# Altium PCB 多通道.PcbDoc (part 3 of 4)
Units mm, origin at the board's own origin, x right, y up, seen from the top; angles counter-clockwise.
Board outline 145 x 32 mm, 2 copper layers (Top Layer, Bottom Layer); 175 components, 157 nets, 554 pads, 195 vias.
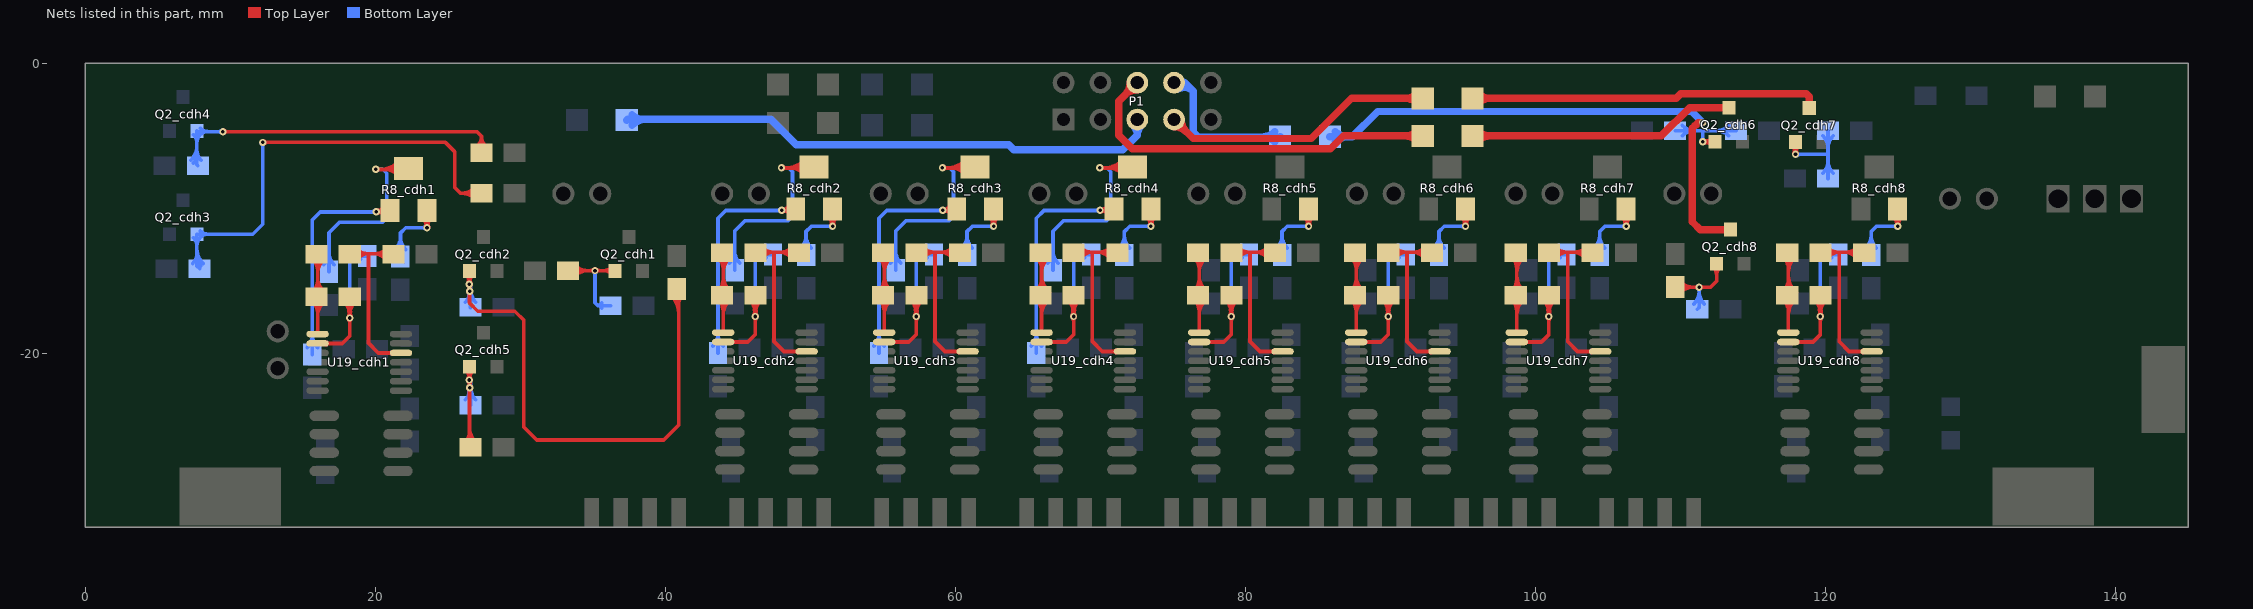
[diagram p3: the nets of this part, all layers, seen from the top]

## Via types
v1: diameter 0.5, hole 0.25, Top Layer to Bottom Layer, 192 vias
v2: diameter 3.1, hole 3.1, Top Layer to Bottom Layer, 3 vias

## Nets (pads, with @x,y where several pads share a name; then routed paths per layer and width w, separated by ;. In a path a pad name is that pad's centre, name@x,y a point inside that pad or via, vN(x,y) a via of type N, cw(c..) or ccw(c..) an arc to the next point about the centre after c; other vN are vias at no path point) (continued)
NetF2_cdh5_2: F2_cdh5.2 P1.5 | length 41.2
  Bottom Layer w0.508: F2_cdh5.2@37.337,-3.922 37.398,-3.861 47.263,-3.861 49.016,-5.613 63.671,-5.613 64.027,-5.969 71.545,-5.969 72.536,-4.978 ; F2_cdh5.2@37.696,-4.281 cw(c38.711,-5.295) 38.711,-3.861 ; F2_cdh5.2@37.696,-3.563 ccw(c38.416,-2.843) 38.416,-3.861 ; P1.5@72.21,-4.26 cw(c71.582,-4.978) 72.536,-4.978 ; P1.5@72.536,-3.886 72.536,-4.978 ; P1.5@72.862,-4.26 ccw(c73.49,-4.978) 72.536,-4.978
NetF2_cdh6_1: F2_cdh6.1 Q2_cdh6.1 | length 21.2
  Top Layer w0.508: F2_cdh6.1@95.644,-5.014 108.67,-5.014 110.617,-3.067 Q2_cdh6.1@113.328,-3.067 ; F2_cdh6.1@96.004,-5.373 cw(c96.871,-6.24) 96.871,-5.014 cw(c96.871,-3.788) F2_cdh6.1@96.004,-4.655 ; Q2_cdh6.1@113.19,-3.205 ccw(c112.855,-3.54) 112.855,-3.067 ccw(c112.855,-2.594) Q2_cdh6.1@113.19,-2.928
NetF2_cdh6_2: F2_cdh6.2 P1.6 | length 29.7
  Top Layer w0.508: P1.6@72.04,-1.346 cw(c70.843,-1.346) 71.689,-2.193 cw(c72.536,-3.04) P1.6@72.536,-1.842 ; P1.6@72.536,-1.346 71.266,-2.616 71.266,-4.978 72.193,-5.906 85.858,-5.906 86.75,-5.014 F2_cdh6.2@92.215,-5.014 ; F2_cdh6.2@91.856,-5.373 ccw(c90.989,-6.24) 90.989,-5.014 ccw(c90.989,-3.788) F2_cdh6.2@91.856,-4.655
NetF2_cdh7_1: F2_cdh7.1 Q2_cdh7.1 | length 26.9
  Top Layer w0.508: F2_cdh7.1@95.644,-2.423 109.686,-2.423 110.001,-2.108 118.669,-2.108 118.866,-2.305 Q2_cdh7.1@118.866,-3.092 ; F2_cdh7.1@96.004,-2.782 cw(c96.871,-3.65) 96.871,-2.423 cw(c96.871,-1.197) F2_cdh7.1@96.004,-2.064 ; Q2_cdh7.1@118.727,-2.929 ccw(c118.392,-2.594) 118.866,-2.594 ccw(c119.339,-2.594) Q2_cdh7.1@119.004,-2.929
NetF2_cdh7_2: F2_cdh7.2 P1.7 | length 22.6
  Top Layer w0.508: P1.7@75.076,-4.382 cw(c75.076,-5.58) 75.923,-4.733 cw(c76.769,-3.886) P1.7@75.572,-3.886 ; P1.7@75.076,-3.886 76.384,-5.194 84.537,-5.194 87.309,-2.423 F2_cdh7.2@92.215,-2.423 ; F2_cdh7.2@91.856,-2.782 ccw(c90.989,-3.65) 90.989,-2.423 ccw(c90.989,-1.197) F2_cdh7.2@91.856,-2.064
NetF2_cdh8_1: F2_cdh8.1 Q2_cdh8.1 | length 40.2
  Top Layer w0.508: 110.968,-4.316 cw(c111.525,-4.873) v1@111.525,-4.085 ; v1(111.525,-4.089) 111.195,-4.089 110.811,-4.473 110.811,-10.945 111.341,-11.474 Q2_cdh8.1@113.43,-11.474 ; Q2_cdh8.1@113.291,-11.613 ccw(c112.957,-11.947) 112.957,-11.474 ccw(c112.957,-11.001) Q2_cdh8.1@113.291,-11.336
  Bottom Layer w0.508: F2_cdh8.1@85.815,-5.07 87.366,-5.07 89.109,-3.327 110.763,-3.327 v1(111.525,-4.089) ; F2_cdh8.1@86.174,-5.429 cw(c87.041,-6.296) 87.041,-5.07 cw(c87.041,-3.843) F2_cdh8.1@86.174,-4.711
NetF2_cdh8_2: F2_cdh8.2 P1.8 | length 14.5
  Bottom Layer w0.508: P1.8@75.07,-1.336 cw(c75.417,-1.959) 75.921,-1.455 ; P1.8@75.076,-1.346 75.813,-1.346 76.397,-1.93 ; P1.8@75.317,-1.78 cw(c75.757,-2.57) 76.397,-1.93 ; 81.102,-5.093 ccw(c81.102,-3.786) F2_cdh8.2@82.026,-4.711 ; 81.216,-5.093 cw(c81.216,-6.239) F2_cdh8.2@82.026,-5.429 ; F2_cdh8.2@82.386,-5.07 82.362,-5.093 76.74,-5.093 76.397,-4.75 76.397,-1.93
NetQ2_cdh1_2: Q2_cdh1.2 R16_cdh1.2 R20_cdh1.1 | length 11.8
  Top Layer w0.254: R16_cdh1.2@33.293,-14.3 v1(35.147,-14.3) 36.502,-14.3 Q2_cdh1.2@36.534,-14.332 ; R16_cdh1.2@33.779,-14.659 cw(c34.646,-15.527) 34.646,-14.3 cw(c34.646,-13.074) R16_cdh1.2@33.779,-13.941 ; v1@35.06,-14.387 ccw(c34.85,-14.597) 34.85,-14.3 ccw(c34.85,-14.003) v1@35.06,-14.213 ; v1@35.234,-14.387 cw(c35.444,-14.597) 35.444,-14.3 cw(c35.444,-14.003) v1@35.234,-14.213 ; 35.737,-14.3 cw(c35.737,-15.104) Q2_cdh1.2@36.306,-14.536 ; 35.771,-14.3 ccw(c35.771,-13.544) Q2_cdh1.2@36.306,-14.079
  Bottom Layer w0.254: v1@35.06,-14.387 cw(c34.85,-14.597) 35.147,-14.597 cw(c35.444,-14.597) v1@35.234,-14.387 ; v1(35.147,-14.3) 35.147,-16.51 35.35,-16.713 ; R20_cdh1.1@35.612,-16.894 ccw(c35.35,-16.993) 35.35,-16.713 ; R20_cdh1.1@35.612,-16.533 cw(c35.35,-16.433) 35.35,-16.713 ; R20_cdh1.1@36.214,-16.713 35.35,-16.713
NetQ2_cdh2_2: Q2_cdh2.2 R16_cdh2.2 R20_cdh2.1 | length 46.9
  Top Layer w0.254: Q2_cdh2.2@26.273,-14.586 cw(c25.721,-15.137) 26.501,-15.137 cw(c27.281,-15.137) Q2_cdh2.2@26.729,-14.586 ; v1@26.379,-15.179 ccw(c26,-14.959) 26.423,-14.846 ; v1@26.399,-15.327 cw(c26.152,-15.574) v1@26.501,-15.574 ; v1@26.399,-15.153 ccw(c26.152,-14.906) 26.501,-14.906 ; v1@26.424,-15.81 cw(c26.239,-15.995) 26.501,-15.995 ; v1@26.424,-15.636 ccw(c26.239,-15.45) v1@26.501,-15.45 ; v1@26.424,-15.133 ccw(c26.296,-14.912) 26.544,-14.978 ; 26.501,-16.044 cw(c26.833,-16.044) v1@26.598,-15.81 ; v1@26.501,-15.5 cw(c26.746,-15.5) v1@26.573,-15.327 ; v1@26.501,-15.401 ccw(c26.833,-15.401) v1@26.598,-15.636 ; 26.501,-14.98 ccw(c26.746,-14.98) v1@26.573,-15.153 ; Q2_cdh2.2@26.501,-14.332 26.501,-16.525 27.07,-17.094 29.61,-17.094 30.245,-17.729 30.245,-25.095 31.134,-25.984 39.897,-25.984 40.913,-24.968 R16_cdh2.2@40.913,-15.57 ; v1@26.533,-15.522 cw(c26.747,-15.464) v1@26.579,-15.32 ; 26.559,-14.922 ccw(c26.885,-15.01) v1@26.592,-15.179 ; R16_cdh2.2@40.427,-16.056 cw(c39.253,-17.23) 40.913,-17.23 ; R16_cdh2.2@40.606,-15.877 cw(c39.866,-16.617) 40.913,-16.617 cw(c41.706,-16.617) R16_cdh2.2@41.145,-16.056
  Bottom Layer w0.254: R20_cdh2.1@26.203,-16.481 ccw(c25.336,-15.614) 26.562,-15.614 ccw(c27.788,-15.614) R20_cdh2.1@26.921,-16.481 ; v1@26.399,-15.327 cw(c26.005,-15.721) v1@26.562,-15.721 ; v1@26.405,-15.784 cw(c26.086,-15.968) 26.441,-16.064 ; v1@26.424,-15.81 cw(c26.092,-16.142) 26.562,-16.142 ; v1@26.424,-15.636 ccw(c26.092,-15.303) v1@26.562,-15.303 ; v1@26.45,-15.829 cw(c26.169,-16.315) 26.711,-16.17 ; v1@26.537,-15.265 26.562,-15.291 R20_cdh2.1@26.562,-16.84
  other v1: 26.511,-15.723 26.486,-15.24
NetQ2_cdh3_2: Q2_cdh3.2 R16_cdh3.2 R20_cdh3.1 | length 38.8
  Top Layer w0.254: v1(12.243,-5.461) 24.835,-5.461 25.47,-6.096 25.47,-8.56 25.876,-8.966 R16_cdh3.2@27.324,-8.966 ; v1@12.33,-5.548 cw(c12.54,-5.758) 12.54,-5.461 cw(c12.54,-5.164) v1@12.33,-5.374 ; R16_cdh3.2@26.838,-9.325 ccw(c25.971,-10.193) 25.971,-8.966 ccw(c25.971,-7.74) R16_cdh3.2@26.838,-8.607
  Bottom Layer w0.254: R20_cdh3.1@7.407,-13.814 ccw(c6.699,-13.106) 7.7,-13.106 ; Q2_cdh3.2@7.472,-12.046 cw(c6.92,-12.597) 7.7,-12.597 cw(c8.48,-12.597) Q2_cdh3.2@7.928,-12.046 ; 7.7,-13.401 ccw(c8.539,-13.401) R20_cdh3.1@7.946,-13.994 ; 7.7,-12.787 ccw(c9.152,-12.787) R20_cdh3.1@8.125,-13.814 ; R20_cdh3.1@7.893,-14.173 7.7,-13.98 Q2_cdh3.2@7.7,-11.792 7.707,-11.786 9.366,-11.786 11.557,-11.786 12.243,-11.1 v1(12.243,-5.461) ; Q2_cdh3.2@7.928,-12.021 cw(c8.496,-12.588) 8.496,-11.786 ; Q2_cdh3.2@7.928,-11.564 ccw(c8.464,-11.028) 8.464,-11.786 ; v1@12.156,-5.548 cw(c11.946,-5.758) 12.243,-5.758 cw(c12.54,-5.758) v1@12.33,-5.548
NetQ2_cdh4_2: Q2_cdh4.2 R16_cdh4.2 R20_cdh4.1 | length 31
  Top Layer w0.254: v1(9.493,-4.724) 27.019,-4.724 27.324,-5.029 ; v1@9.58,-4.811 cw(c9.79,-5.021) 9.79,-4.724 cw(c9.79,-4.427) v1@9.58,-4.637 ; R16_cdh4.2@26.984,-5.795 ccw(c26.292,-5.029) 27.324,-5.029 ; R16_cdh4.2@27.324,-6.172 27.324,-5.029 ; R16_cdh4.2@27.664,-5.795 cw(c28.356,-5.029) 27.324,-5.029
  Bottom Layer w0.254: R20_cdh4.1@7.28,-6.702 ccw(c6.265,-5.687) 7.7,-5.687 ; R20_cdh4.1@7.459,-6.882 ccw(c6.878,-6.301) 7.7,-6.301 ; Q2_cdh4.2@7.472,-4.934 cw(c6.92,-5.485) 7.7,-5.485 cw(c8.48,-5.485) 7.928,-4.934 cw(c8.433,-5.439) 8.433,-4.724 ; 7.7,-5.982 ccw(c8.718,-5.982) R20_cdh4.1@7.998,-6.702 ; R20_cdh4.1@7.766,-7.061 7.7,-6.995 Q2_cdh4.2@7.7,-4.68 7.744,-4.724 v1(9.493,-4.724) ; Q2_cdh4.2@7.928,-4.477 ccw(c8.526,-3.879) 8.526,-4.724 ; v1@9.406,-4.811 ccw(c9.196,-5.021) 9.196,-4.724 ccw(c9.196,-4.427) v1@9.406,-4.637
NetQ2_cdh5_2: Q2_cdh5.2 R16_cdh5.2 R20_cdh5.1 | length 17.6
  Top Layer w0.254: R16_cdh5.2@26.203,-26.133 ccw(c25.483,-25.413) 26.501,-25.413 ; Q2_cdh5.2@26.273,-21.19 cw(c25.721,-21.741) 26.501,-21.741 cw(c27.281,-21.741) Q2_cdh5.2@26.729,-21.19 ; v1@26.379,-21.783 ccw(c26,-21.563) 26.423,-21.45 ; v1@26.399,-21.931 cw(c26.152,-22.178) v1@26.501,-22.178 ; v1@26.399,-21.757 ccw(c26.152,-21.51) 26.501,-21.51 ; v1@26.424,-22.464 cw(c26.239,-22.65) 26.501,-22.65 ; v1@26.424,-22.29 ccw(c26.239,-22.105) 26.501,-22.105 ; v1@26.424,-21.737 ccw(c26.296,-21.516) 26.544,-21.582 ; 26.501,-25.732 ccw(c27.323,-25.732) R16_cdh5.2@26.742,-26.313 ; 26.501,-25.118 ccw(c27.936,-25.118) R16_cdh5.2@26.921,-26.133 ; 26.501,-22.699 cw(c26.833,-22.699) v1@26.598,-22.464 ; 26.501,-22.104 cw(c26.746,-22.104) v1@26.573,-21.931 ; v1@26.501,-22.056 ccw(c26.833,-22.056) v1@26.598,-22.29 ; 26.501,-21.584 ccw(c26.746,-21.584) v1@26.573,-21.757 ; Q2_cdh5.2@26.501,-20.936 26.501,-26.177 R16_cdh5.2@26.562,-26.238 ; v1@26.527,-22.155 cw(c26.773,-22.089) v1@26.579,-21.924 ; 26.559,-21.526 ccw(c26.885,-21.614) v1@26.592,-21.783
  Bottom Layer w0.254: R20_cdh5.1@26.203,-23.212 ccw(c25.336,-22.345) 26.562,-22.345 ccw(c27.788,-22.345) R20_cdh5.1@26.921,-23.212 ; v1@26.399,-21.931 cw(c26.005,-22.325) v1@26.562,-22.325 ; v1@26.405,-22.439 cw(c26.027,-22.657) 26.448,-22.769 ; v1@26.424,-22.464 cw(c26.092,-22.797) 26.562,-22.797 ; v1@26.424,-22.29 ccw(c26.092,-21.958) v1@26.562,-21.958 ; v1@26.45,-22.484 cw(c26.203,-22.911) 26.68,-22.783 ; v1(26.486,-21.844) 26.562,-21.92 R20_cdh5.1@26.562,-23.571
  other v1: 26.511,-22.377
NetQ2_cdh6_2: Q2_cdh6.2 R16_cdh6.2 R20_cdh6.1 | length 12.4
  Top Layer w0.254: v1(111.518,-5.417) Q2_cdh6.2@112.378,-5.417 ; v1@111.58,-5.523 cw(c111.764,-5.842) 111.859,-5.487 ; v1@111.58,-5.31 ccw(c111.764,-4.992) 111.859,-5.347 ; v1@111.605,-5.504 cw(c111.815,-5.714) 111.815,-5.417 cw(c111.815,-5.12) v1@111.605,-5.33 ; Q2_cdh6.2@112.15,-5.645 ccw(c111.599,-6.197) 111.599,-5.417 ccw(c111.599,-4.637) Q2_cdh6.2@112.15,-5.188
  Bottom Layer w0.254: R16_cdh6.2@109.62,-4.648 111.474,-4.648 ; R16_cdh6.2@110.106,-5.007 cw(c110.973,-5.875) 110.973,-4.648 cw(c110.973,-3.422) R16_cdh6.2@110.106,-4.289 ; v1@111.431,-5.33 ccw(c111.221,-5.12) 111.518,-5.12 ccw(c111.815,-5.12) v1@111.605,-5.33 ; v1(111.518,-5.417) 111.518,-4.692 111.474,-4.648 ; R20_cdh6.1@113.325,-5.007 ccw(c112.458,-5.875) 112.458,-4.648 ccw(c112.458,-3.422) R20_cdh6.1@113.325,-4.289 ; R20_cdh6.1@113.811,-4.648 111.474,-4.648
NetQ2_cdh7_2: Q2_cdh7.2 R16_cdh7.2 R20_cdh7.1 | length 13.3
  Top Layer w0.254: Q2_cdh7.2@117.687,-5.696 cw(c117.136,-6.247) 117.916,-6.247 cw(c118.695,-6.247) Q2_cdh7.2@118.144,-5.696 ; v1@117.809,-6.223 ccw(c117.524,-6.058) 117.842,-5.972 ; v1@117.829,-6.197 ccw(c117.619,-5.987) 117.916,-5.987 ccw(c118.213,-5.987) v1@118.003,-6.197 ; 117.854,-6.017 ccw(c118.109,-5.949) v1@117.977,-6.177 ; v1@117.854,-6.177 ccw(c117.722,-5.949) 117.977,-6.017 ; v1(117.916,-6.284) Q2_cdh7.2@117.916,-5.442 ; 117.989,-5.972 ccw(c118.308,-6.058) v1@118.022,-6.223
  Bottom Layer w0.254: v1(117.916,-6.284) 120.146,-6.284 ; v1@118.003,-6.371 cw(c118.213,-6.581) 118.213,-6.284 cw(c118.213,-5.987) v1@118.003,-6.197 ; R16_cdh7.2@119.802,-7.591 ccw(c118.935,-6.724) 120.161,-6.724 ccw(c121.387,-6.724) R16_cdh7.2@120.52,-7.591 ; R20_cdh7.1@119.802,-5.007 cw(c118.935,-5.875) 120.161,-5.875 cw(c121.387,-5.875) R20_cdh7.1@120.52,-5.007 ; R16_cdh7.2@120.161,-7.95 R20_cdh7.1@120.161,-4.648
NetQ2_cdh8_2: Q2_cdh8.2 R16_cdh8.2 R20_cdh8.1 | length 12.3
  Top Layer w0.254: R16_cdh8.2@109.62,-15.443 v1(111.271,-15.443) 112.058,-15.443 112.48,-15.022 Q2_cdh8.2@112.48,-13.824 ; R16_cdh8.2@109.979,-15.802 cw(c110.846,-16.67) 110.846,-15.443 cw(c110.846,-14.217) R16_cdh8.2@109.979,-15.084 ; v1@111.184,-15.53 ccw(c110.974,-15.74) 110.974,-15.443 ccw(c110.974,-15.146) v1@111.184,-15.356 ; v1@111.358,-15.53 cw(c111.568,-15.74) 111.568,-15.443 cw(c111.568,-15.146) v1@111.358,-15.356 ; Q2_cdh8.2@112.252,-14.078 cw(c111.7,-14.629) 112.48,-14.629 cw(c113.26,-14.629) Q2_cdh8.2@112.708,-14.078
  Bottom Layer w0.254: R20_cdh8.1@110.912,-16.608 ccw(c110.045,-15.741) 111.271,-15.741 ; R20_cdh8.1@111.144,-16.967 111.271,-16.84 v1(111.271,-15.443) ; v1@111.184,-15.53 cw(c110.974,-15.74) 111.271,-15.74 ; v1@111.358,-15.53 ccw(c111.568,-15.74) 111.271,-15.74 ; R20_cdh8.1@111.63,-16.608 cw(c112.497,-15.741) 111.271,-15.741
NetR3_cdh1_1: R3_cdh1.1 R14_cdh1.1 U19_cdh1.2 | length 15.8
  Top Layer w0.254: U19_cdh1.2@16.023,-19.325 17.721,-19.325 18.238,-18.808 R3_cdh1.1@18.238,-16.104 ; U19_cdh1.2@16.642,-19.394 cw(c16.81,-19.561) 16.81,-19.325 cw(c16.81,-19.088) U19_cdh1.2@16.642,-19.256 ; R3_cdh1.1@17.879,-16.463 cw(c17.011,-17.33) 18.238,-17.33 cw(c19.464,-17.33) R3_cdh1.1@18.597,-16.463 ; v1@18.128,-17.505 ccw(c17.682,-17.247) 18.18,-17.114 ; v1@18.148,-17.653 cw(c17.931,-17.87) 18.238,-17.87 ; v1@18.148,-17.479 ccw(c17.931,-17.263) 18.238,-17.263 ; 18.238,-17.857 cw(c18.525,-17.857) v1@18.322,-17.653 ; 18.238,-17.276 ccw(c18.525,-17.276) v1@18.322,-17.479 ; 18.292,-17.128 ccw(c18.772,-17.257) v1@18.342,-17.505
  Bottom Layer w0.254: v1@18.148,-17.479 ccw(c17.938,-17.269) 18.235,-17.269 ccw(c18.532,-17.269) v1@18.322,-17.479 ; v1(18.235,-17.566) 18.235,-13.706 18.641,-13.299 ; R14_cdh1.1@18.998,-13.522 ccw(c18.641,-13.695) 18.641,-13.299 ; R14_cdh1.1@18.998,-13.077 cw(c18.641,-12.903) 18.641,-13.299 ; R14_cdh1.1@19.454,-13.299 18.641,-13.299
NetR3_cdh1_2: R3_cdh1.2 R4_cdh1.1 U19_cdh1.1 | length 13.6
  Top Layer w0.254: R3_cdh1.2@15.72,-16.463 cw(c14.987,-17.196) 16.023,-17.196 ; R3_cdh1.2@15.72,-15.744 ccw(c14.987,-15.011) 16.023,-15.011 ; R4_cdh1.1@15.72,-13.542 cw(c14.987,-14.275) 16.023,-14.275 ; R4_cdh1.1@15.952,-13.183 16.023,-13.254 U19_cdh1.1@16.023,-18.675 ; U19_cdh1.1@15.954,-18.606 ccw(c15.787,-18.438) 16.023,-18.438 ccw(c16.26,-18.438) U19_cdh1.1@16.092,-18.606 ; 16.023,-17.464 cw(c17.439,-17.464) R3_cdh1.2@16.438,-16.463 ; 16.023,-16.851 cw(c16.826,-16.851) R3_cdh1.2@16.258,-16.283 ; 16.023,-15.356 ccw(c16.826,-15.356) R3_cdh1.2@16.258,-15.924 ; 16.023,-14.743 ccw(c17.439,-14.743) R3_cdh1.2@16.438,-15.744 ; 16.023,-14.543 cw(c17.439,-14.543) R4_cdh1.1@16.438,-13.542 ; 16.023,-13.93 cw(c16.826,-13.93) R4_cdh1.1@16.258,-13.362
NetR3_cdh2_1: R3_cdh2.1 R14_cdh2.1 U19_cdh2.2 | length 15.8
  Top Layer w0.254: U19_cdh2.2@43.989,-19.223 45.687,-19.223 46.203,-18.707 R3_cdh2.1@46.203,-16.002 ; U19_cdh2.2@44.608,-19.292 cw(c44.775,-19.46) 44.775,-19.223 cw(c44.775,-18.987) U19_cdh2.2@44.608,-19.154 ; R3_cdh2.1@45.844,-16.361 cw(c44.977,-17.228) 46.203,-17.228 cw(c47.43,-17.228) R3_cdh2.1@46.562,-16.361 ; v1@46.094,-17.403 ccw(c45.648,-17.146) 46.145,-17.012 ; v1@46.113,-17.552 cw(c45.897,-17.769) 46.203,-17.769 ; v1@46.113,-17.378 ccw(c45.897,-17.161) 46.203,-17.161 ; 46.203,-17.755 cw(c46.491,-17.755) v1@46.287,-17.552 ; 46.203,-17.175 ccw(c46.491,-17.175) v1@46.287,-17.378 ; 46.257,-17.026 ccw(c46.737,-17.155) v1@46.307,-17.403
  Bottom Layer w0.254: v1@46.113,-17.378 ccw(c45.903,-17.168) 46.2,-17.168 ccw(c46.497,-17.168) v1@46.287,-17.378 ; v1(46.2,-17.465) 46.2,-13.604 46.607,-13.198 ; R14_cdh2.1@46.963,-13.42 ccw(c46.607,-13.594) 46.607,-13.198 ; R14_cdh2.1@46.963,-12.975 cw(c46.607,-12.801) 46.607,-13.198 ; R14_cdh2.1@47.42,-13.198 46.607,-13.198
NetR3_cdh2_2: R3_cdh2.2 R4_cdh2.1 U19_cdh2.1 | length 13.6
  Top Layer w0.254: R3_cdh2.2@43.685,-16.361 cw(c42.952,-17.094) 43.989,-17.094 ; R3_cdh2.2@43.685,-15.643 ccw(c42.952,-14.91) 43.989,-14.91 ; R4_cdh2.1@43.685,-13.44 cw(c42.952,-14.173) 43.989,-14.173 ; R4_cdh2.1@43.917,-13.081 43.989,-13.152 U19_cdh2.1@43.989,-18.573 ; U19_cdh2.1@43.919,-18.504 ccw(c43.752,-18.337) 43.989,-18.337 ccw(c44.225,-18.337) U19_cdh2.1@44.058,-18.504 ; 43.989,-17.363 cw(c45.405,-17.363) R3_cdh2.2@44.403,-16.361 ; 43.989,-16.749 cw(c44.792,-16.749) R3_cdh2.2@44.224,-16.182 ; 43.989,-15.255 ccw(c44.792,-15.255) R3_cdh2.2@44.224,-15.822 ; 43.989,-14.641 ccw(c45.405,-14.641) R3_cdh2.2@44.403,-15.643 ; 43.989,-14.442 cw(c45.405,-14.442) R4_cdh2.1@44.403,-13.44 ; 43.989,-13.828 cw(c44.792,-13.828) R4_cdh2.1@44.224,-13.261
NetR3_cdh3_1: R3_cdh3.1 R14_cdh3.1 U19_cdh3.2 | length 15.8
  Top Layer w0.254: U19_cdh3.2@55.088,-19.223 56.786,-19.223 57.303,-18.707 R3_cdh3.1@57.303,-16.002 ; U19_cdh3.2@55.708,-19.292 cw(c55.875,-19.46) 55.875,-19.223 cw(c55.875,-18.987) U19_cdh3.2@55.708,-19.154 ; R3_cdh3.1@56.944,-16.361 cw(c56.077,-17.228) 57.303,-17.228 cw(c58.529,-17.228) R3_cdh3.1@57.662,-16.361 ; v1@57.194,-17.403 ccw(c56.748,-17.146) 57.245,-17.012 ; v1@57.213,-17.552 cw(c56.996,-17.769) 57.303,-17.769 ; v1@57.213,-17.378 ccw(c56.996,-17.161) 57.303,-17.161 ; 57.303,-17.755 cw(c57.59,-17.755) v1@57.387,-17.552 ; 57.303,-17.175 ccw(c57.59,-17.175) v1@57.387,-17.378 ; 57.357,-17.026 ccw(c57.837,-17.155) v1@57.407,-17.403
  Bottom Layer w0.254: v1@57.213,-17.378 ccw(c57.003,-17.168) 57.3,-17.168 ccw(c57.597,-17.168) v1@57.387,-17.378 ; v1(57.3,-17.465) 57.3,-13.604 57.707,-13.198 ; R14_cdh3.1@58.063,-13.42 ccw(c57.707,-13.594) 57.707,-13.198 ; R14_cdh3.1@58.063,-12.975 cw(c57.707,-12.801) 57.707,-13.198 ; R14_cdh3.1@58.519,-13.198 57.707,-13.198
NetR3_cdh3_2: R3_cdh3.2 R4_cdh3.1 U19_cdh3.1 | length 13.6
  Top Layer w0.254: R3_cdh3.2@54.785,-16.361 cw(c54.052,-17.094) 55.088,-17.094 ; R3_cdh3.2@54.785,-15.643 ccw(c54.052,-14.91) 55.088,-14.91 ; R4_cdh3.1@54.785,-13.44 cw(c54.052,-14.173) 55.088,-14.173 ; R4_cdh3.1@55.017,-13.081 55.088,-13.152 U19_cdh3.1@55.088,-18.573 ; U19_cdh3.1@55.019,-18.504 ccw(c54.852,-18.337) 55.088,-18.337 ccw(c55.325,-18.337) U19_cdh3.1@55.158,-18.504 ; 55.088,-17.363 cw(c56.505,-17.363) R3_cdh3.2@55.503,-16.361 ; 55.088,-16.749 cw(c55.891,-16.749) R3_cdh3.2@55.324,-16.182 ; 55.088,-15.255 ccw(c55.891,-15.255) R3_cdh3.2@55.324,-15.822 ; 55.088,-14.641 ccw(c56.505,-14.641) R3_cdh3.2@55.503,-15.643 ; 55.088,-14.442 cw(c56.505,-14.442) R4_cdh3.1@55.503,-13.44 ; 55.088,-13.828 cw(c55.891,-13.828) R4_cdh3.1@55.324,-13.261
NetR3_cdh4_1: R3_cdh4.1 R14_cdh4.1 U19_cdh4.2 | length 15.8
  Top Layer w0.254: U19_cdh4.2@65.934,-19.223 67.632,-19.223 68.149,-18.707 R3_cdh4.1@68.149,-16.002 ; U19_cdh4.2@66.553,-19.292 cw(c66.721,-19.46) 66.721,-19.223 cw(c66.721,-18.987) U19_cdh4.2@66.553,-19.154 ; R3_cdh4.1@67.79,-16.361 cw(c66.922,-17.228) 68.149,-17.228 cw(c69.375,-17.228) R3_cdh4.1@68.508,-16.361 ; v1@68.039,-17.403 ccw(c67.593,-17.146) 68.091,-17.012 ; v1@68.059,-17.552 cw(c67.842,-17.769) 68.149,-17.769 ; v1@68.059,-17.378 ccw(c67.842,-17.161) 68.149,-17.161 ; 68.149,-17.755 cw(c68.436,-17.755) v1@68.233,-17.552 ; 68.149,-17.175 ccw(c68.436,-17.175) v1@68.233,-17.378 ; 68.203,-17.026 ccw(c68.683,-17.155) v1@68.253,-17.403
  Bottom Layer w0.254: v1@68.059,-17.378 ccw(c67.849,-17.168) 68.146,-17.168 ccw(c68.443,-17.168) v1@68.233,-17.378 ; v1(68.146,-17.465) 68.146,-13.604 68.552,-13.198 ; R14_cdh4.1@68.909,-13.42 ccw(c68.552,-13.594) 68.552,-13.198 ; R14_cdh4.1@68.909,-12.975 cw(c68.552,-12.801) 68.552,-13.198 ; R14_cdh4.1@69.365,-13.198 68.552,-13.198
NetR3_cdh4_2: R3_cdh4.2 R4_cdh4.1 U19_cdh4.1 | length 13.6
  Top Layer w0.254: R3_cdh4.2@65.631,-16.361 cw(c64.898,-17.094) 65.934,-17.094 ; R3_cdh4.2@65.631,-15.643 ccw(c64.898,-14.91) 65.934,-14.91 ; R4_cdh4.1@65.631,-13.44 cw(c64.898,-14.173) 65.934,-14.173 ; R4_cdh4.1@65.863,-13.081 65.934,-13.152 U19_cdh4.1@65.934,-18.573 ; U19_cdh4.1@65.865,-18.504 ccw(c65.698,-18.337) 65.934,-18.337 ccw(c66.171,-18.337) U19_cdh4.1@66.003,-18.504 ; 65.934,-17.363 cw(c67.35,-17.363) R3_cdh4.2@66.349,-16.361 ; 65.934,-16.749 cw(c66.737,-16.749) R3_cdh4.2@66.169,-16.182 ; 65.934,-15.255 ccw(c66.737,-15.255) R3_cdh4.2@66.169,-15.822 ; 65.934,-14.641 ccw(c67.35,-14.641) R3_cdh4.2@66.349,-15.643 ; 65.934,-14.442 cw(c67.35,-14.442) R4_cdh4.1@66.349,-13.44 ; 65.934,-13.828 cw(c66.737,-13.828) R4_cdh4.1@66.169,-13.261
NetR3_cdh5_1: R3_cdh5.1 R14_cdh5.1 U19_cdh5.2 | length 15.8
  Top Layer w0.254: U19_cdh5.2@76.805,-19.223 78.503,-19.223 79.02,-18.707 R3_cdh5.1@79.02,-16.002 ; U19_cdh5.2@77.425,-19.292 cw(c77.592,-19.46) 77.592,-19.223 cw(c77.592,-18.987) U19_cdh5.2@77.425,-19.154 ; R3_cdh5.1@78.661,-16.361 cw(c77.794,-17.228) 79.02,-17.228 cw(c80.246,-17.228) R3_cdh5.1@79.379,-16.361 ; v1@78.911,-17.403 ccw(c78.465,-17.146) 78.962,-17.012 ; v1@78.93,-17.552 cw(c78.713,-17.769) 79.02,-17.769 ; v1@78.93,-17.378 ccw(c78.713,-17.161) 79.02,-17.161 ; 79.02,-17.755 cw(c79.307,-17.755) v1@79.104,-17.552 ; 79.02,-17.175 ccw(c79.307,-17.175) v1@79.104,-17.378 ; 79.074,-17.026 ccw(c79.554,-17.155) v1@79.124,-17.403
  Bottom Layer w0.254: v1@78.93,-17.378 ccw(c78.72,-17.168) 79.017,-17.168 ccw(c79.314,-17.168) v1@79.104,-17.378 ; v1(79.017,-17.465) 79.017,-13.604 79.424,-13.198 ; R14_cdh5.1@79.78,-13.42 ccw(c79.424,-13.594) 79.424,-13.198 ; R14_cdh5.1@79.78,-12.975 cw(c79.424,-12.801) 79.424,-13.198 ; R14_cdh5.1@80.236,-13.198 79.424,-13.198
NetR3_cdh5_2: R3_cdh5.2 R4_cdh5.1 U19_cdh5.1 | length 13.6
  Top Layer w0.254: R3_cdh5.2@76.502,-16.361 cw(c75.769,-17.094) 76.805,-17.094 ; R3_cdh5.2@76.502,-15.643 ccw(c75.769,-14.91) 76.805,-14.91 ; R4_cdh5.1@76.502,-13.44 cw(c75.769,-14.173) 76.805,-14.173 ; R4_cdh5.1@76.734,-13.081 76.805,-13.152 U19_cdh5.1@76.805,-18.573 ; U19_cdh5.1@76.736,-18.504 ccw(c76.569,-18.337) 76.805,-18.337 ccw(c77.042,-18.337) U19_cdh5.1@76.875,-18.504 ; 76.805,-17.363 cw(c78.222,-17.363) R3_cdh5.2@77.22,-16.361 ; 76.805,-16.749 cw(c77.608,-16.749) R3_cdh5.2@77.041,-16.182 ; 76.805,-15.255 ccw(c77.608,-15.255) R3_cdh5.2@77.041,-15.822 ; 76.805,-14.641 ccw(c78.222,-14.641) R3_cdh5.2@77.22,-15.643 ; 76.805,-14.442 cw(c78.222,-14.442) R4_cdh5.1@77.22,-13.44 ; 76.805,-13.828 cw(c77.608,-13.828) R4_cdh5.1@77.041,-13.261
NetR3_cdh6_1: R3_cdh6.1 R14_cdh6.1 U19_cdh6.2 | length 15.8
  Top Layer w0.254: U19_cdh6.2@87.626,-19.223 89.324,-19.223 89.84,-18.707 R3_cdh6.1@89.84,-16.002 ; U19_cdh6.2@88.245,-19.292 cw(c88.412,-19.46) 88.412,-19.223 cw(c88.412,-18.987) U19_cdh6.2@88.245,-19.154 ; R3_cdh6.1@89.481,-16.361 cw(c88.614,-17.228) 89.84,-17.228 cw(c91.067,-17.228) R3_cdh6.1@90.2,-16.361 ; v1@89.731,-17.403 ccw(c89.285,-17.146) 89.783,-17.012 ; v1@89.751,-17.552 cw(c89.534,-17.769) 89.84,-17.769 ; v1@89.751,-17.378 ccw(c89.534,-17.161) 89.84,-17.161 ; 89.84,-17.755 cw(c90.128,-17.755) v1@89.925,-17.552 ; 89.84,-17.175 ccw(c90.128,-17.175) v1@89.925,-17.378 ; 89.895,-17.026 ccw(c90.374,-17.155) v1@89.944,-17.403
  Bottom Layer w0.254: v1@89.751,-17.378 ccw(c89.541,-17.168) 89.838,-17.168 ccw(c90.135,-17.168) v1@89.925,-17.378 ; v1(89.838,-17.465) 89.838,-13.604 90.244,-13.198 ; R14_cdh6.1@90.6,-13.42 ccw(c90.244,-13.594) 90.244,-13.198 ; R14_cdh6.1@90.6,-12.975 cw(c90.244,-12.801) 90.244,-13.198 ; R14_cdh6.1@91.057,-13.198 90.244,-13.198
NetR3_cdh6_2: R3_cdh6.2 R4_cdh6.1 U19_cdh6.1 | length 13.6
  Top Layer w0.254: R3_cdh6.2@87.322,-16.361 cw(c86.589,-17.094) 87.626,-17.094 ; R3_cdh6.2@87.322,-15.643 ccw(c86.589,-14.91) 87.626,-14.91 ; R4_cdh6.1@87.322,-13.44 cw(c86.589,-14.173) 87.626,-14.173 ; R4_cdh6.1@87.554,-13.081 87.626,-13.152 U19_cdh6.1@87.626,-18.573 ; U19_cdh6.1@87.557,-18.504 ccw(c87.389,-18.337) 87.626,-18.337 ccw(c87.862,-18.337) U19_cdh6.1@87.695,-18.504 ; 87.626,-17.363 cw(c89.042,-17.363) R3_cdh6.2@88.041,-16.361 ; 87.626,-16.749 cw(c88.429,-16.749) R3_cdh6.2@87.861,-16.182 ; 87.626,-15.255 ccw(c88.429,-15.255) R3_cdh6.2@87.861,-15.822 ; 87.626,-14.641 ccw(c89.042,-14.641) R3_cdh6.2@88.041,-15.643 ; 87.626,-14.442 cw(c89.042,-14.442) R4_cdh6.1@88.041,-13.44 ; 87.626,-13.828 cw(c88.429,-13.828) R4_cdh6.1@87.861,-13.261
NetR3_cdh7_1: R3_cdh7.1 R14_cdh7.1 U19_cdh7.2 | length 15.8
  Top Layer w0.254: U19_cdh7.2@98.7,-19.223 100.398,-19.223 100.915,-18.707 R3_cdh7.1@100.915,-16.002 ; U19_cdh7.2@99.319,-19.292 cw(c99.487,-19.46) 99.487,-19.223 cw(c99.487,-18.987) U19_cdh7.2@99.319,-19.154 ; R3_cdh7.1@100.556,-16.361 cw(c99.688,-17.228) 100.915,-17.228 cw(c102.141,-17.228) R3_cdh7.1@101.274,-16.361 ; v1@100.805,-17.403 ccw(c100.359,-17.146) 100.857,-17.012 ; v1@100.825,-17.552 cw(c100.608,-17.769) 100.915,-17.769 ; v1@100.825,-17.378 ccw(c100.608,-17.161) 100.915,-17.161 ; 100.915,-17.755 cw(c101.202,-17.755) v1@100.999,-17.552 ; 100.915,-17.175 ccw(c101.202,-17.175) v1@100.999,-17.378 ; 100.969,-17.026 ccw(c101.449,-17.155) v1@101.019,-17.403
  Bottom Layer w0.254: v1@100.825,-17.378 ccw(c100.615,-17.168) 100.912,-17.168 ccw(c101.209,-17.168) v1@100.999,-17.378 ; v1(100.912,-17.465) 100.912,-13.604 101.318,-13.198 ; R14_cdh7.1@101.675,-13.42 ccw(c101.318,-13.594) 101.318,-13.198 ; R14_cdh7.1@101.675,-12.975 cw(c101.318,-12.801) 101.318,-13.198 ; R14_cdh7.1@102.131,-13.198 101.318,-13.198
NetR3_cdh7_2: R3_cdh7.2 R4_cdh7.1 U19_cdh7.1 | length 13.6
  Top Layer w0.254: R3_cdh7.2@98.397,-16.361 cw(c97.664,-17.094) 98.7,-17.094 ; R3_cdh7.2@98.397,-15.643 ccw(c97.664,-14.91) 98.7,-14.91 ; R4_cdh7.1@98.397,-13.44 cw(c97.664,-14.173) 98.7,-14.173 ; R4_cdh7.1@98.629,-13.081 98.7,-13.152 U19_cdh7.1@98.7,-18.573 ; U19_cdh7.1@98.631,-18.504 ccw(c98.464,-18.337) 98.7,-18.337 ccw(c98.937,-18.337) U19_cdh7.1@98.769,-18.504 ; 98.7,-17.363 cw(c100.116,-17.363) R3_cdh7.2@99.115,-16.361 ; 98.7,-16.749 cw(c99.503,-16.749) R3_cdh7.2@98.935,-16.182 ; 98.7,-15.255 ccw(c99.503,-15.255) R3_cdh7.2@98.935,-15.822 ; 98.7,-14.641 ccw(c100.116,-14.641) R3_cdh7.2@99.115,-15.643 ; 98.7,-14.442 cw(c100.116,-14.442) R4_cdh7.1@99.115,-13.44 ; 98.7,-13.828 cw(c99.503,-13.828) R4_cdh7.1@98.935,-13.261
NetR3_cdh8_1: R3_cdh8.1 R14_cdh8.1 U19_cdh8.2 | length 15.8
  Top Layer w0.254: U19_cdh8.2@117.42,-19.223 119.118,-19.223 119.635,-18.707 R3_cdh8.1@119.635,-16.002 ; U19_cdh8.2@118.039,-19.292 cw(c118.207,-19.46) 118.207,-19.223 cw(c118.207,-18.987) U19_cdh8.2@118.039,-19.154 ; R3_cdh8.1@119.275,-16.361 cw(c118.408,-17.228) 119.635,-17.228 cw(c120.861,-17.228) R3_cdh8.1@119.994,-16.361 ; v1@119.525,-17.403 ccw(c119.079,-17.146) 119.577,-17.012 ; v1@119.545,-17.552 cw(c119.328,-17.769) 119.635,-17.769 ; v1@119.545,-17.378 ccw(c119.328,-17.161) 119.635,-17.161 ; 119.635,-17.755 cw(c119.922,-17.755) v1@119.719,-17.552 ; 119.635,-17.175 ccw(c119.922,-17.175) v1@119.719,-17.378 ; 119.689,-17.026 ccw(c120.168,-17.155) v1@119.738,-17.403
  Bottom Layer w0.254: v1@119.545,-17.378 ccw(c119.335,-17.168) 119.632,-17.168 ccw(c119.929,-17.168) v1@119.719,-17.378 ; v1(119.632,-17.465) 119.632,-13.604 120.038,-13.198 ; R14_cdh8.1@120.394,-13.42 ccw(c120.038,-13.594) 120.038,-13.198 ; R14_cdh8.1@120.394,-12.975 cw(c120.038,-12.801) 120.038,-13.198 ; R14_cdh8.1@120.851,-13.198 120.038,-13.198
NetR3_cdh8_2: R3_cdh8.2 R4_cdh8.1 U19_cdh8.1 | length 13.6
  Top Layer w0.254: R3_cdh8.2@117.116,-16.361 cw(c116.383,-17.094) 117.42,-17.094 ; R3_cdh8.2@117.116,-15.643 ccw(c116.383,-14.91) 117.42,-14.91 ; R4_cdh8.1@117.116,-13.44 cw(c116.383,-14.173) 117.42,-14.173 ; R4_cdh8.1@117.349,-13.081 117.42,-13.152 U19_cdh8.1@117.42,-18.573 ; U19_cdh8.1@117.351,-18.504 ccw(c117.183,-18.337) 117.42,-18.337 ccw(c117.657,-18.337) U19_cdh8.1@117.489,-18.504 ; 117.42,-17.363 cw(c118.836,-17.363) R3_cdh8.2@117.835,-16.361 ; 117.42,-16.749 cw(c118.223,-16.749) R3_cdh8.2@117.655,-16.182 ; 117.42,-15.255 ccw(c118.223,-15.255) R3_cdh8.2@117.655,-15.822 ; 117.42,-14.641 ccw(c118.836,-14.641) R3_cdh8.2@117.835,-15.643 ; 117.42,-14.442 cw(c118.836,-14.442) R4_cdh8.1@117.835,-13.44 ; 117.42,-13.828 cw(c118.223,-13.828) R4_cdh8.1@117.655,-13.261
NetR4_cdh1_2: R4_cdh1.2 R22_cdh1.1 U19_cdh1.12 | length 16.8
  Top Layer w0.254: R4_cdh1.2@18.238,-13.183 18.289,-13.132 19.53,-13.132 ; R4_cdh1.2@18.563,-13.342 cw(c19.001,-13.693) 19.001,-13.132 ; R4_cdh1.2@18.724,-12.823 ccw(c19.469,-12.079) 19.469,-13.132 ; R4_cdh1.2@18.761,-13.501 cw(c19.53,-14.119) 19.53,-13.132 ; 19.807,-13.132 cw(c19.807,-14.496) R22_cdh1.1@20.771,-13.531 ; 20.002,-13.132 ccw(c20.002,-12.043) R22_cdh1.1@20.771,-12.813 ; 20.42,-13.132 cw(c20.42,-13.883) R22_cdh1.1@20.951,-13.352 ; U19_cdh1.12@21.154,-20.044 ccw(c20.987,-20.211) 20.987,-19.975 ccw(c20.987,-19.738) U19_cdh1.12@21.154,-19.906 ; R22_cdh1.1@21.258,-13.132 19.53,-13.132 ; U19_cdh1.12@21.773,-19.975 20.212,-19.975 19.53,-19.294 19.53,-13.132
NetR4_cdh2_2: R4_cdh2.2 R22_cdh2.1 U19_cdh2.12 | length 16.8
  Top Layer w0.254: R4_cdh2.2@46.203,-13.081 46.254,-13.03 47.496,-13.03 ; R4_cdh2.2@46.528,-13.24 cw(c46.966,-13.592) 46.966,-13.03 ; R4_cdh2.2@46.689,-12.722 ccw(c47.434,-11.977) 47.434,-13.03 ; R4_cdh2.2@46.726,-13.399 cw(c47.496,-14.017) 47.496,-13.03 ; 47.772,-13.03 cw(c47.772,-14.395) R22_cdh2.1@48.737,-13.43 ; 47.967,-13.03 ccw(c47.967,-11.942) R22_cdh2.1@48.737,-12.711 ; 48.385,-13.03 cw(c48.385,-13.781) R22_cdh2.1@48.916,-13.25 ; U19_cdh2.12@49.119,-19.942 ccw(c48.952,-20.11) 48.952,-19.873 ccw(c48.952,-19.637) U19_cdh2.12@49.119,-19.804 ; R22_cdh2.1@49.223,-13.03 47.496,-13.03 ; U19_cdh2.12@49.739,-19.873 48.177,-19.873 47.496,-19.192 47.496,-13.03
NetR4_cdh3_2: R4_cdh3.2 R22_cdh3.1 U19_cdh3.12 | length 16.8
  Top Layer w0.254: R4_cdh3.2@57.303,-13.081 57.354,-13.03 58.596,-13.03 ; R4_cdh3.2@57.628,-13.24 cw(c58.066,-13.592) 58.066,-13.03 ; R4_cdh3.2@57.789,-12.722 ccw(c58.534,-11.977) 58.534,-13.03 ; R4_cdh3.2@57.826,-13.399 cw(c58.596,-14.017) 58.596,-13.03 ; 58.872,-13.03 cw(c58.872,-14.395) R22_cdh3.1@59.837,-13.43 ; 59.067,-13.03 ccw(c59.067,-11.942) R22_cdh3.1@59.837,-12.711 ; 59.485,-13.03 cw(c59.485,-13.781) R22_cdh3.1@60.016,-13.25 ; U19_cdh3.12@60.219,-19.942 ccw(c60.052,-20.11) 60.052,-19.873 ccw(c60.052,-19.637) U19_cdh3.12@60.219,-19.804 ; R22_cdh3.1@60.323,-13.03 58.596,-13.03 ; U19_cdh3.12@60.838,-19.873 59.277,-19.873 58.596,-19.192 58.596,-13.03
NetR4_cdh4_2: R4_cdh4.2 R22_cdh4.1 U19_cdh4.12 | length 16.8
  Top Layer w0.254: R4_cdh4.2@68.149,-13.081 68.2,-13.03 69.441,-13.03 ; R4_cdh4.2@68.474,-13.24 cw(c68.912,-13.592) 68.912,-13.03 ; R4_cdh4.2@68.635,-12.722 ccw(c69.38,-11.977) 69.38,-13.03 ; R4_cdh4.2@68.672,-13.399 cw(c69.441,-14.017) 69.441,-13.03 ; 69.718,-13.03 cw(c69.718,-14.395) R22_cdh4.1@70.682,-13.43 ; 69.913,-13.03 ccw(c69.913,-11.942) R22_cdh4.1@70.682,-12.711 ; 70.331,-13.03 cw(c70.331,-13.781) R22_cdh4.1@70.862,-13.25 ; U19_cdh4.12@71.065,-19.942 ccw(c70.898,-20.11) 70.898,-19.873 ccw(c70.898,-19.637) U19_cdh4.12@71.065,-19.804 ; R22_cdh4.1@71.169,-13.03 69.441,-13.03 ; U19_cdh4.12@71.684,-19.873 70.123,-19.873 69.441,-19.192 69.441,-13.03
NetR4_cdh5_2: R4_cdh5.2 R22_cdh5.1 U19_cdh5.12 | length 16.8
  Top Layer w0.254: R4_cdh5.2@79.02,-13.081 79.071,-13.03 80.313,-13.03 ; R4_cdh5.2@79.345,-13.24 cw(c79.783,-13.592) 79.783,-13.03 ; R4_cdh5.2@79.506,-12.722 ccw(c80.251,-11.977) 80.251,-13.03 ; R4_cdh5.2@79.543,-13.399 cw(c80.313,-14.017) 80.313,-13.03 ; 80.589,-13.03 cw(c80.589,-14.395) R22_cdh5.1@81.554,-13.43 ; 80.784,-13.03 ccw(c80.784,-11.942) R22_cdh5.1@81.554,-12.711 ; 81.202,-13.03 cw(c81.202,-13.781) R22_cdh5.1@81.733,-13.25 ; U19_cdh5.12@81.936,-19.942 ccw(c81.769,-20.11) 81.769,-19.873 ccw(c81.769,-19.637) U19_cdh5.12@81.936,-19.804 ; R22_cdh5.1@82.04,-13.03 80.313,-13.03 ; U19_cdh5.12@82.555,-19.873 80.994,-19.873 80.313,-19.192 80.313,-13.03
NetR4_cdh6_2: R4_cdh6.2 R22_cdh6.1 U19_cdh6.12 | length 16.8
  Top Layer w0.254: R4_cdh6.2@89.84,-13.081 89.891,-13.03 91.133,-13.03 ; R4_cdh6.2@90.165,-13.24 cw(c90.603,-13.592) 90.603,-13.03 ; R4_cdh6.2@90.327,-12.722 ccw(c91.071,-11.977) 91.071,-13.03 ; R4_cdh6.2@90.363,-13.399 cw(c91.133,-14.017) 91.133,-13.03 ; 91.409,-13.03 cw(c91.409,-14.395) R22_cdh6.1@92.374,-13.43 ; 91.604,-13.03 ccw(c91.604,-11.942) R22_cdh6.1@92.374,-12.711 ; 92.022,-13.03 cw(c92.022,-13.781) R22_cdh6.1@92.554,-13.25 ; U19_cdh6.12@92.757,-19.942 ccw(c92.589,-20.11) 92.589,-19.873 ccw(c92.589,-19.637) U19_cdh6.12@92.757,-19.804 ; R22_cdh6.1@92.86,-13.03 91.133,-13.03 ; U19_cdh6.12@93.376,-19.873 91.814,-19.873 91.133,-19.192 91.133,-13.03
NetR4_cdh7_2: R4_cdh7.2 R22_cdh7.1 U19_cdh7.12 | length 16.8
  Top Layer w0.254: R4_cdh7.2@100.915,-13.081 100.966,-13.03 102.207,-13.03 ; R4_cdh7.2@101.24,-13.24 cw(c101.678,-13.592) 101.678,-13.03 ; R4_cdh7.2@101.401,-12.722 ccw(c102.146,-11.977) 102.146,-13.03 ; R4_cdh7.2@101.438,-13.399 cw(c102.207,-14.017) 102.207,-13.03 ; 102.484,-13.03 cw(c102.484,-14.395) R22_cdh7.1@103.448,-13.43 ; 102.679,-13.03 ccw(c102.679,-11.942) R22_cdh7.1@103.448,-12.711 ; 103.097,-13.03 cw(c103.097,-13.781) R22_cdh7.1@103.628,-13.25 ; U19_cdh7.12@103.831,-19.942 ccw(c103.664,-20.11) 103.664,-19.873 ccw(c103.664,-19.637) U19_cdh7.12@103.831,-19.804 ; R22_cdh7.1@103.935,-13.03 102.207,-13.03 ; U19_cdh7.12@104.45,-19.873 102.889,-19.873 102.207,-19.192 102.207,-13.03
NetR4_cdh8_2: R4_cdh8.2 R22_cdh8.1 U19_cdh8.12 | length 16.8
  Top Layer w0.254: R4_cdh8.2@119.635,-13.081 119.685,-13.03 120.927,-13.03 ; R4_cdh8.2@119.96,-13.24 cw(c120.397,-13.592) 120.397,-13.03 ; R4_cdh8.2@120.121,-12.722 ccw(c120.865,-11.977) 120.865,-13.03 ; R4_cdh8.2@120.158,-13.399 cw(c120.927,-14.017) 120.927,-13.03 ; 121.203,-13.03 cw(c121.203,-14.395) R22_cdh8.1@122.168,-13.43 ; 121.399,-13.03 ccw(c121.399,-11.942) R22_cdh8.1@122.168,-12.711 ; 121.817,-13.03 cw(c121.817,-13.781) R22_cdh8.1@122.348,-13.25 ; U19_cdh8.12@122.551,-19.942 ccw(c122.383,-20.11) 122.383,-19.873 ccw(c122.383,-19.637) U19_cdh8.12@122.551,-19.804 ; R22_cdh8.1@122.654,-13.03 120.927,-13.03 ; U19_cdh8.12@123.17,-19.873 121.608,-19.873 120.927,-19.192 120.927,-13.03
NetR6_cdh1_2: R6_cdh1.2 R8_cdh1.1 | length 10
  Top Layer w0.254: R8_cdh1.1@23.262,-10.741 cw(c22.843,-11.328) v1@23.565,-11.328 ; v1@23.458,-11.282 ccw(c23.19,-11.127) 23.489,-11.046 ; v1@23.478,-11.256 ccw(c23.268,-11.046) 23.565,-11.046 ccw(c23.862,-11.046) v1@23.652,-11.256 ; 23.494,-11.065 ccw(c23.768,-10.991) v1@23.626,-11.237 ; v1@23.503,-11.237 ccw(c23.361,-10.991) 23.635,-11.065 ; R8_cdh1.1@23.565,-10.338 v1@23.565,-11.328 ; 23.64,-11.046 ccw(c23.94,-11.127) v1@23.671,-11.282 ; R8_cdh1.1@23.777,-10.179 R8_cdh1.1@23.95,-10.353 ; R8_cdh1.1@23.868,-10.741 ccw(c24.286,-11.328) v1@23.565,-11.328
  Bottom Layer w0.254: R6_cdh1.2@21.377,-12.849 ccw(c20.51,-11.982) 21.736,-11.982 ccw(c22.962,-11.982) R6_cdh1.2@22.095,-12.849 ; R6_cdh1.2@21.736,-13.335 21.736,-11.709 22.102,-11.343 v1(23.565,-11.343) ; v1@23.478,-11.43 ccw(c23.268,-11.64) 23.268,-11.343 ccw(c23.268,-11.046) v1@23.478,-11.256
NetR6_cdh2_2: R6_cdh2.2 R8_cdh2.1 | length 10
  Top Layer w0.254: R8_cdh2.1@51.227,-10.639 cw(c50.809,-11.227) v1@51.53,-11.227 ; v1@51.424,-11.18 ccw(c51.155,-11.025) 51.455,-10.945 ; v1@51.443,-11.155 ccw(c51.233,-10.945) 51.53,-10.945 ccw(c51.827,-10.945) v1@51.617,-11.155 ; 51.46,-10.963 ccw(c51.734,-10.89) v1@51.592,-11.135 ; v1@51.469,-11.135 ccw(c51.327,-10.89) 51.601,-10.963 ; R8_cdh2.1@51.53,-10.236 v1@51.53,-11.227 ; 51.606,-10.945 ccw(c51.905,-11.025) v1@51.637,-11.18 ; R8_cdh2.1@51.742,-10.078 R8_cdh2.1@51.915,-10.251 ; R8_cdh2.1@51.833,-10.639 ccw(c52.252,-11.227) v1@51.53,-11.227
  Bottom Layer w0.254: R6_cdh2.2@49.342,-12.747 ccw(c48.475,-11.88) 49.701,-11.88 ccw(c50.928,-11.88) R6_cdh2.2@50.061,-12.747 ; R6_cdh2.2@49.701,-13.233 49.701,-11.608 50.067,-11.242 v1(51.53,-11.242) ; v1@51.443,-11.329 ccw(c51.233,-11.539) 51.233,-11.242 ccw(c51.233,-10.945) v1@51.443,-11.155
NetR6_cdh3_2: R6_cdh3.2 R8_cdh3.1 | length 10
  Top Layer w0.254: R8_cdh3.1@62.327,-10.639 cw(c61.909,-11.227) v1@62.63,-11.227 ; v1@62.523,-11.18 ccw(c62.255,-11.025) 62.554,-10.945 ; v1@62.543,-11.155 ccw(c62.333,-10.945) 62.63,-10.945 ccw(c62.927,-10.945) v1@62.717,-11.155 ; 62.559,-10.963 ccw(c62.833,-10.89) v1@62.691,-11.135 ; v1@62.568,-11.135 ccw(c62.427,-10.89) 62.701,-10.963 ; R8_cdh3.1@62.63,-10.236 v1@62.63,-11.227 ; 62.706,-10.945 ccw(c63.005,-11.025) v1@62.737,-11.18 ; R8_cdh3.1@62.842,-10.078 R8_cdh3.1@63.015,-10.251 ; R8_cdh3.1@62.933,-10.639 ccw(c63.351,-11.227) v1@62.63,-11.227
  Bottom Layer w0.254: R6_cdh3.2@60.442,-12.747 ccw(c59.575,-11.88) 60.801,-11.88 ccw(c62.028,-11.88) R6_cdh3.2@61.16,-12.747 ; R6_cdh3.2@60.801,-13.233 60.801,-11.608 61.167,-11.242 v1(62.63,-11.242) ; v1@62.543,-11.329 ccw(c62.333,-11.539) 62.333,-11.242 ccw(c62.333,-10.945) v1@62.543,-11.155
NetR6_cdh4_2: R6_cdh4.2 R8_cdh4.1 | length 10
  Top Layer w0.254: R8_cdh4.1@73.173,-10.639 cw(c72.754,-11.227) v1@73.476,-11.227 ; v1@73.369,-11.18 ccw(c73.101,-11.025) 73.4,-10.945 ; v1@73.389,-11.155 ccw(c73.179,-10.945) 73.476,-10.945 ccw(c73.773,-10.945) v1@73.563,-11.155 ; 73.405,-10.963 ccw(c73.679,-10.89) v1@73.537,-11.135 ; v1@73.414,-11.135 ccw(c73.272,-10.89) 73.546,-10.963 ; R8_cdh4.1@73.476,-10.236 v1@73.476,-11.227 ; 73.551,-10.945 ccw(c73.851,-11.025) v1@73.582,-11.18 ; R8_cdh4.1@73.688,-10.078 R8_cdh4.1@73.861,-10.251 ; R8_cdh4.1@73.779,-10.639 ccw(c74.197,-11.227) v1@73.476,-11.227
  Bottom Layer w0.254: R6_cdh4.2@71.288,-12.747 ccw(c70.421,-11.88) 71.647,-11.88 ccw(c72.873,-11.88) R6_cdh4.2@72.006,-12.747 ; R6_cdh4.2@71.647,-13.233 71.647,-11.608 72.013,-11.242 v1(73.476,-11.242) ; v1@73.389,-11.329 ccw(c73.179,-11.539) 73.179,-11.242 ccw(c73.179,-10.945) v1@73.389,-11.155
NetR6_cdh5_2: R6_cdh5.2 R8_cdh5.1 | length 10
  Top Layer w0.254: R8_cdh5.1@84.044,-10.639 cw(c83.626,-11.227) v1@84.347,-11.227 ; v1@84.24,-11.18 ccw(c83.972,-11.025) 84.271,-10.945 ; v1@84.26,-11.155 ccw(c84.05,-10.945) 84.347,-10.945 ccw(c84.644,-10.945) v1@84.434,-11.155 ; 84.276,-10.963 ccw(c84.55,-10.89) v1@84.408,-11.135 ; v1@84.285,-11.135 ccw(c84.144,-10.89) 84.418,-10.963 ; R8_cdh5.1@84.347,-10.236 v1@84.347,-11.227 ; 84.423,-10.945 ccw(c84.722,-11.025) v1@84.454,-11.18 ; R8_cdh5.1@84.559,-10.078 R8_cdh5.1@84.732,-10.251 ; R8_cdh5.1@84.65,-10.639 ccw(c85.068,-11.227) v1@84.347,-11.227
  Bottom Layer w0.254: R6_cdh5.2@82.159,-12.747 ccw(c81.292,-11.88) 82.518,-11.88 ccw(c83.745,-11.88) R6_cdh5.2@82.877,-12.747 ; R6_cdh5.2@82.518,-13.233 82.518,-11.608 82.884,-11.242 v1(84.347,-11.242) ; v1@84.26,-11.329 ccw(c84.05,-11.539) 84.05,-11.242 ccw(c84.05,-10.945) v1@84.26,-11.155
NetR6_cdh6_2: R6_cdh6.2 R8_cdh6.1 | length 10
  Top Layer w0.254: R8_cdh6.1@94.864,-10.639 cw(c94.446,-11.227) v1@95.167,-11.227 ; v1@95.061,-11.18 ccw(c94.792,-11.025) 95.092,-10.945 ; v1@95.08,-11.155 ccw(c94.87,-10.945) 95.167,-10.945 ccw(c95.464,-10.945) v1@95.254,-11.155 ; 95.097,-10.963 ccw(c95.371,-10.89) v1@95.229,-11.135 ; v1@95.106,-11.135 ccw(c94.964,-10.89) 95.238,-10.963 ; R8_cdh6.1@95.167,-10.236 v1@95.167,-11.227 ; 95.243,-10.945 ccw(c95.543,-11.025) v1@95.274,-11.18 ; R8_cdh6.1@95.379,-10.078 R8_cdh6.1@95.553,-10.251 ; R8_cdh6.1@95.471,-10.639 ccw(c95.889,-11.227) v1@95.167,-11.227
  Bottom Layer w0.254: R6_cdh6.2@92.979,-12.747 ccw(c92.112,-11.88) 93.339,-11.88 ccw(c94.565,-11.88) R6_cdh6.2@93.698,-12.747 ; R6_cdh6.2@93.339,-13.233 93.339,-11.608 93.705,-11.242 v1(95.167,-11.242) ; v1@95.08,-11.329 ccw(c94.87,-11.539) 94.87,-11.242 ccw(c94.87,-10.945) v1@95.08,-11.155
NetR6_cdh7_2: R6_cdh7.2 R8_cdh7.1 | length 10
  Top Layer w0.254: R8_cdh7.1@105.939,-10.639 cw(c105.52,-11.227) v1@106.242,-11.227 ; v1@106.135,-11.18 ccw(c105.867,-11.025) 106.166,-10.945 ; v1@106.155,-11.155 ccw(c105.945,-10.945) 106.242,-10.945 ccw(c106.539,-10.945) v1@106.329,-11.155 ; 106.171,-10.963 ccw(c106.445,-10.89) v1@106.303,-11.135 ; v1@106.18,-11.135 ccw(c106.038,-10.89) 106.312,-10.963 ; R8_cdh7.1@106.242,-10.236 v1@106.242,-11.227 ; 106.317,-10.945 ccw(c106.617,-11.025) v1@106.348,-11.18 ; R8_cdh7.1@106.454,-10.078 R8_cdh7.1@106.627,-10.251 ; R8_cdh7.1@106.545,-10.639 ccw(c106.963,-11.227) v1@106.242,-11.227
  Bottom Layer w0.254: R6_cdh7.2@104.054,-12.747 ccw(c103.187,-11.88) 104.413,-11.88 ccw(c105.639,-11.88) R6_cdh7.2@104.772,-12.747 ; R6_cdh7.2@104.413,-13.233 104.413,-11.608 104.779,-11.242 v1(106.242,-11.242) ; v1@106.155,-11.329 ccw(c105.945,-11.539) 105.945,-11.242 ccw(c105.945,-10.945) v1@106.155,-11.155
NetR6_cdh8_2: R6_cdh8.2 R8_cdh8.1 | length 10
  Top Layer w0.254: R8_cdh8.1@124.658,-10.639 cw(c124.24,-11.227) v1@124.962,-11.227 ; v1@124.855,-11.18 ccw(c124.586,-11.025) 124.886,-10.945 ; v1@124.875,-11.155 ccw(c124.665,-10.945) 124.962,-10.945 ccw(c125.259,-10.945) v1@125.049,-11.155 ; 124.891,-10.963 ccw(c125.165,-10.89) v1@125.023,-11.135 ; v1@124.9,-11.135 ccw(c124.758,-10.89) 125.032,-10.963 ; R8_cdh8.1@124.962,-10.236 v1@124.962,-11.227 ; 125.037,-10.945 ccw(c125.337,-11.025) v1@125.068,-11.18 ; R8_cdh8.1@125.173,-10.078 R8_cdh8.1@125.347,-10.251 ; R8_cdh8.1@125.265,-10.639 ccw(c125.683,-11.227) v1@124.962,-11.227
  Bottom Layer w0.254: R6_cdh8.2@122.774,-12.747 ccw(c121.906,-11.88) 123.133,-11.88 ccw(c124.359,-11.88) R6_cdh8.2@123.492,-12.747 ; R6_cdh8.2@123.133,-13.233 123.133,-11.608 123.499,-11.242 v1(124.962,-11.242) ; v1@124.875,-11.329 ccw(c124.665,-11.539) 124.665,-11.242 ccw(c124.665,-10.945) v1@124.875,-11.155
NetR8_cdh1_2: R8_cdh1.2 R18_cdh1.2 | length 19.2
  Top Layer w0.254: v1@20.121,-10.343 cw(c20.279,-10.617) 20.361,-10.311 ; v1@20.121,-10.13 ccw(c20.26,-9.89) 20.331,-10.157 ; v1@20.147,-10.323 cw(c20.371,-10.548) 20.371,-10.23 ; v1@20.147,-10.149 ccw(c20.342,-9.954) 20.342,-10.23 ; v1@20.166,-10.175 ccw(c20.406,-10.036) 20.334,-10.304 ; v1@20.167,-10.296 cw(c20.427,-10.439) 20.351,-10.152 ; R8_cdh1.2@20.47,-10.179 20.419,-10.23 v1@20.06,-10.23 ; R8_cdh1.2@20.56,-9.925 cw(c20.06,-9.668) v1@20.06,-10.23 ; R8_cdh1.2@20.62,-10.496 ccw(c20.06,-10.955) v1@20.06,-10.23
  Bottom Layer w0.254: R18_cdh1.2@15.306,-19.605 ccw(c14.439,-18.738) 15.665,-18.738 ccw(c16.892,-18.738) R18_cdh1.2@16.025,-19.605 ; R18_cdh1.2@15.665,-20.091 15.665,-10.795 16.199,-10.262 20.034,-10.262 v1(20.06,-10.236) ; 19.701,-10.262 ccw(c19.701,-9.878) v1@19.973,-10.149
NetR8_cdh1_3: R8_cdh1.3 R12_cdh1.1 | length 19.8
  Top Layer w0.254: v1@20.034,-7.33 21.689,-7.33 R8_cdh1.3@21.74,-7.279 ; v1@20.121,-7.402 cw(c20.295,-7.576) 20.295,-7.33 ; v1@20.121,-7.228 ccw(c20.367,-6.982) 20.367,-7.33 ; 20.311,-7.33 ccw(c20.311,-5.481) R8_cdh1.3@21.619,-6.789 ; 20.629,-7.33 cw(c20.629,-8.73) R8_cdh1.3@21.619,-7.74 ; 20.924,-7.33 ccw(c20.924,-6.094) R8_cdh1.3@21.799,-6.968 ; 21.242,-7.33 cw(c21.242,-8.117) R8_cdh1.3@21.799,-7.561
  Bottom Layer w0.254: R12_cdh1.1@16.449,-13.89 ccw(c15.582,-13.023) 16.808,-13.023 ccw(c18.035,-13.023) R12_cdh1.1@17.168,-13.89 ; R12_cdh1.1@16.808,-14.376 16.808,-11.684 17.53,-10.962 20.502,-10.962 20.796,-10.668 20.796,-7.595 20.517,-7.315 v1(20.034,-7.315) ; v1@20.121,-7.402 cw(c20.331,-7.612) 20.331,-7.315 cw(c20.331,-7.018) v1@20.121,-7.228
NetR8_cdh2_2: R8_cdh2.2 R18_cdh2.2 | length 19.2
  Top Layer w0.254: v1@48.086,-10.241 cw(c48.245,-10.515) 48.327,-10.209 ; v1@48.086,-10.028 ccw(c48.225,-9.788) 48.297,-10.056 ; v1@48.112,-10.222 cw(c48.336,-10.446) 48.336,-10.129 ; v1@48.112,-10.048 ccw(c48.307,-9.852) 48.307,-10.129 ; v1@48.132,-10.073 ccw(c48.372,-9.935) 48.3,-10.202 ; v1@48.133,-10.194 cw(c48.393,-10.338) 48.316,-10.051 ; R8_cdh2.2@48.436,-10.078 48.385,-10.129 v1@48.025,-10.129 ; R8_cdh2.2@48.525,-9.824 cw(c48.025,-9.566) v1@48.025,-10.129 ; R8_cdh2.2@48.586,-10.394 ccw(c48.025,-10.853) v1@48.025,-10.129
  Bottom Layer w0.254: R18_cdh2.2@43.272,-19.504 ccw(c42.404,-18.636) 43.631,-18.636 ccw(c44.857,-18.636) R18_cdh2.2@43.99,-19.504 ; R18_cdh2.2@43.631,-19.99 43.631,-10.693 44.164,-10.16 48,-10.16 v1(48.025,-10.135) ; 47.667,-10.16 ccw(c47.667,-9.776) v1@47.938,-10.048
NetR8_cdh2_3: R8_cdh2.3 R12_cdh2.1 | length 19.8
  Top Layer w0.254: v1@48,-7.229 49.655,-7.229 R8_cdh2.3@49.706,-7.178 ; v1@48.087,-7.301 cw(c48.26,-7.474) 48.26,-7.229 ; v1@48.087,-7.127 ccw(c48.333,-6.88) 48.333,-7.229 ; 48.277,-7.229 ccw(c48.277,-5.379) R8_cdh2.3@49.584,-6.687 ; 48.594,-7.229 cw(c48.594,-8.629) R8_cdh2.3@49.584,-7.639 ; 48.89,-7.229 ccw(c48.89,-5.992) R8_cdh2.3@49.764,-6.867 ; 49.207,-7.229 cw(c49.207,-8.015) R8_cdh2.3@49.764,-7.459
  Bottom Layer w0.254: R12_cdh2.1@44.415,-13.789 ccw(c43.547,-12.921) 44.774,-12.921 ccw(c46,-12.921) R12_cdh2.1@45.133,-13.789 ; R12_cdh2.1@44.774,-14.275 44.774,-11.582 45.495,-10.861 48.467,-10.861 48.762,-10.566 48.762,-7.493 48.482,-7.214 v1(48,-7.214) ; v1@48.087,-7.301 cw(c48.297,-7.511) 48.297,-7.214 cw(c48.297,-6.917) v1@48.087,-7.127
NetR8_cdh3_2: R8_cdh3.2 R18_cdh3.2 | length 19.2
  Top Layer w0.254: v1@59.186,-10.241 cw(c59.345,-10.515) 59.427,-10.209 ; v1@59.186,-10.028 ccw(c59.325,-9.788) 59.397,-10.056 ; v1@59.212,-10.222 cw(c59.436,-10.446) 59.436,-10.129 ; v1@59.212,-10.048 ccw(c59.407,-9.852) 59.407,-10.129 ; v1@59.231,-10.073 ccw(c59.471,-9.935) 59.4,-10.202 ; v1@59.232,-10.194 cw(c59.493,-10.338) 59.416,-10.051 ; R8_cdh3.2@59.535,-10.078 59.485,-10.129 v1@59.125,-10.129 ; R8_cdh3.2@59.625,-9.824 cw(c59.125,-9.566) v1@59.125,-10.129 ; R8_cdh3.2@59.685,-10.394 ccw(c59.125,-10.853) v1@59.125,-10.129
  Bottom Layer w0.254: R18_cdh3.2@54.371,-19.504 ccw(c53.504,-18.636) 54.731,-18.636 ccw(c55.957,-18.636) R18_cdh3.2@55.09,-19.504 ; R18_cdh3.2@54.731,-19.99 54.731,-10.693 55.264,-10.16 59.099,-10.16 v1(59.125,-10.135) ; 58.767,-10.16 ccw(c58.767,-9.776) v1@59.038,-10.048
NetR8_cdh3_3: R8_cdh3.3 R12_cdh3.1 | length 19.8
  Top Layer w0.254: v1@59.099,-7.229 60.755,-7.229 R8_cdh3.3@60.805,-7.178 ; v1@59.186,-7.301 cw(c59.36,-7.474) 59.36,-7.229 ; v1@59.186,-7.127 ccw(c59.433,-6.88) 59.433,-7.229 ; 59.376,-7.229 ccw(c59.376,-5.379) R8_cdh3.3@60.684,-6.687 ; 59.694,-7.229 cw(c59.694,-8.629) R8_cdh3.3@60.684,-7.639 ; 59.99,-7.229 ccw(c59.99,-5.992) R8_cdh3.3@60.864,-6.867 ; 60.307,-7.229 cw(c60.307,-8.015) R8_cdh3.3@60.864,-7.459
  Bottom Layer w0.254: R12_cdh3.1@55.514,-13.789 ccw(c54.647,-12.921) 55.874,-12.921 ccw(c57.1,-12.921) R12_cdh3.1@56.233,-13.789 ; R12_cdh3.1@55.874,-14.275 55.874,-11.582 56.595,-10.861 59.567,-10.861 59.861,-10.566 59.861,-7.493 59.582,-7.214 v1(59.099,-7.214) ; v1@59.186,-7.301 cw(c59.396,-7.511) 59.396,-7.214 cw(c59.396,-6.917) v1@59.186,-7.127
NetR8_cdh4_2: R8_cdh4.2 R18_cdh4.2 | length 19.2
  Top Layer w0.254: v1@70.032,-10.241 cw(c70.19,-10.515) 70.272,-10.209 ; v1@70.032,-10.028 ccw(c70.171,-9.788) 70.242,-10.056 ; v1@70.058,-10.222 cw(c70.282,-10.446) 70.282,-10.129 ; v1@70.058,-10.048 ccw(c70.253,-9.852) 70.253,-10.129 ; v1@70.077,-10.073 ccw(c70.317,-9.935) 70.245,-10.202 ; v1@70.078,-10.194 cw(c70.338,-10.338) 70.262,-10.051 ; R8_cdh4.2@70.381,-10.078 70.33,-10.129 v1@69.971,-10.129 ; R8_cdh4.2@70.471,-9.824 cw(c69.971,-9.566) v1@69.971,-10.129 ; R8_cdh4.2@70.531,-10.394 ccw(c69.971,-10.853) v1@69.971,-10.129
  Bottom Layer w0.254: R18_cdh4.2@65.217,-19.504 ccw(c64.35,-18.636) 65.576,-18.636 ccw(c66.803,-18.636) R18_cdh4.2@65.936,-19.504 ; R18_cdh4.2@65.576,-19.99 65.576,-10.693 66.11,-10.16 69.945,-10.16 v1(69.971,-10.135) ; 69.612,-10.16 ccw(c69.612,-9.776) v1@69.884,-10.048
NetR8_cdh4_3: R8_cdh4.3 R12_cdh4.1 | length 19.8
  Top Layer w0.254: v1@69.945,-7.229 71.6,-7.229 R8_cdh4.3@71.651,-7.178 ; v1@70.032,-7.301 cw(c70.206,-7.474) 70.206,-7.229 ; v1@70.032,-7.127 ccw(c70.278,-6.88) 70.278,-7.229 ; 70.222,-7.229 ccw(c70.222,-5.379) R8_cdh4.3@71.53,-6.687 ; 70.54,-7.229 cw(c70.54,-8.629) R8_cdh4.3@71.53,-7.639 ; 70.835,-7.229 ccw(c70.835,-5.992) R8_cdh4.3@71.71,-6.867 ; 71.153,-7.229 cw(c71.153,-8.015) R8_cdh4.3@71.71,-7.459
  Bottom Layer w0.254: R12_cdh4.1@66.36,-13.789 ccw(c65.493,-12.921) 66.719,-12.921 ccw(c67.946,-12.921) R12_cdh4.1@67.079,-13.789 ; R12_cdh4.1@66.719,-14.275 66.719,-11.582 67.441,-10.861 70.413,-10.861 70.707,-10.566 70.707,-7.493 70.428,-7.214 v1(69.945,-7.214) ; v1@70.032,-7.301 cw(c70.242,-7.511) 70.242,-7.214 cw(c70.242,-6.917) v1@70.032,-7.127